# Altium PCB PCB1.PcbDoc
Units mm, origin at the board's own origin, x right, y up, seen from the top; angles counter-clockwise.
Board outline 109.75 x 55 mm, 2 copper layers (Top Layer, Bottom Layer); 17 components, 18 nets, 83 pads, 0 vias.
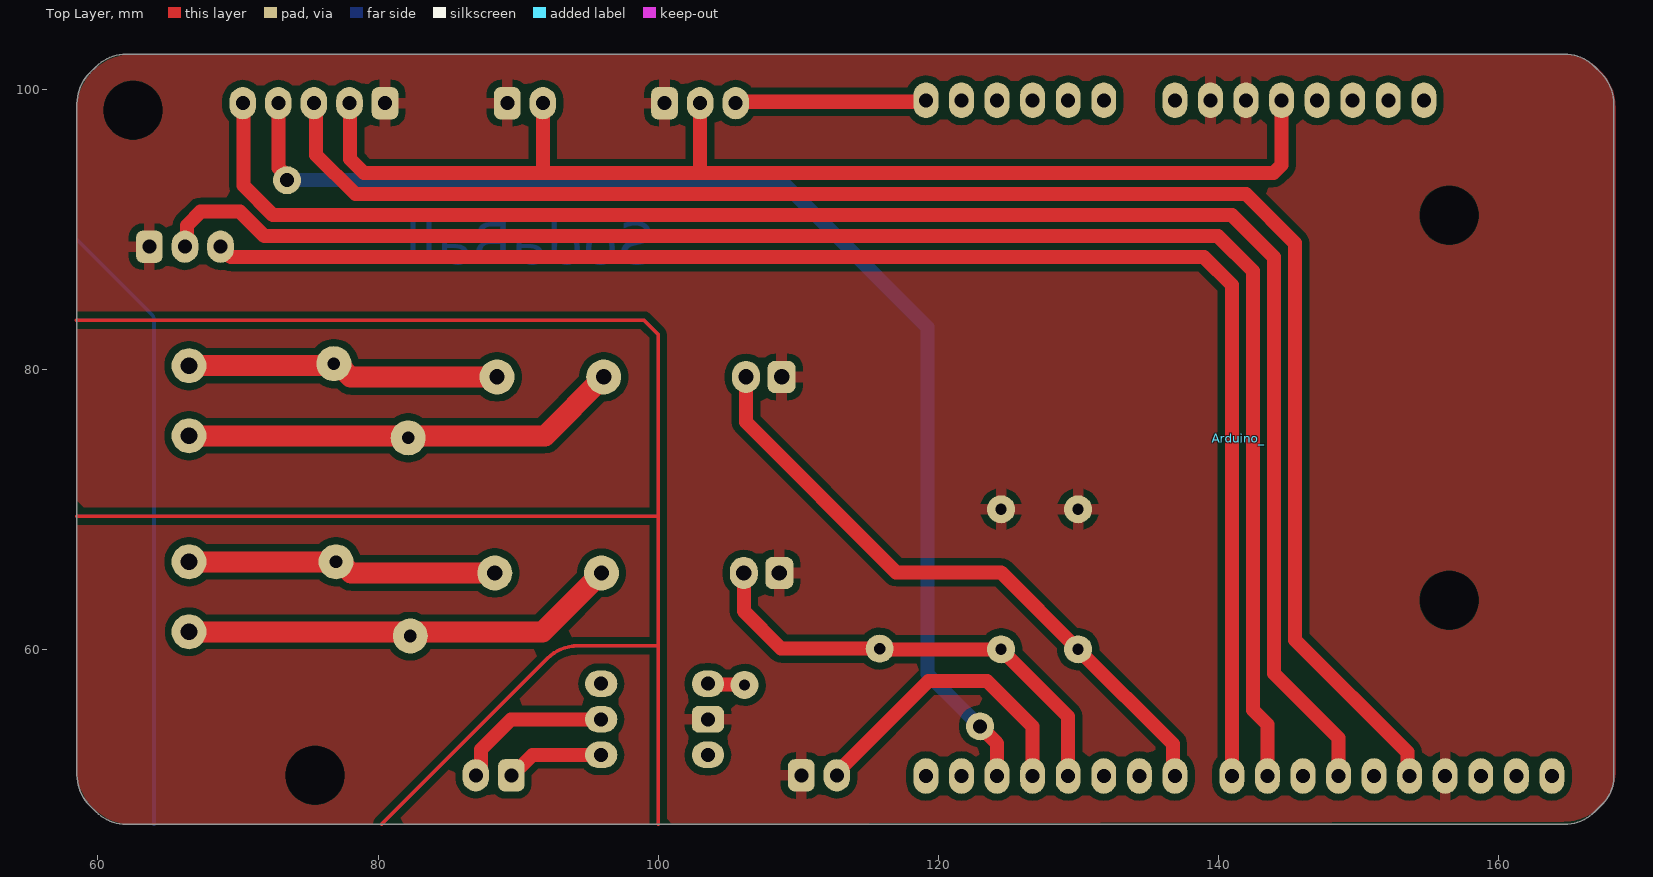
[diagram p0: Top Layer view]
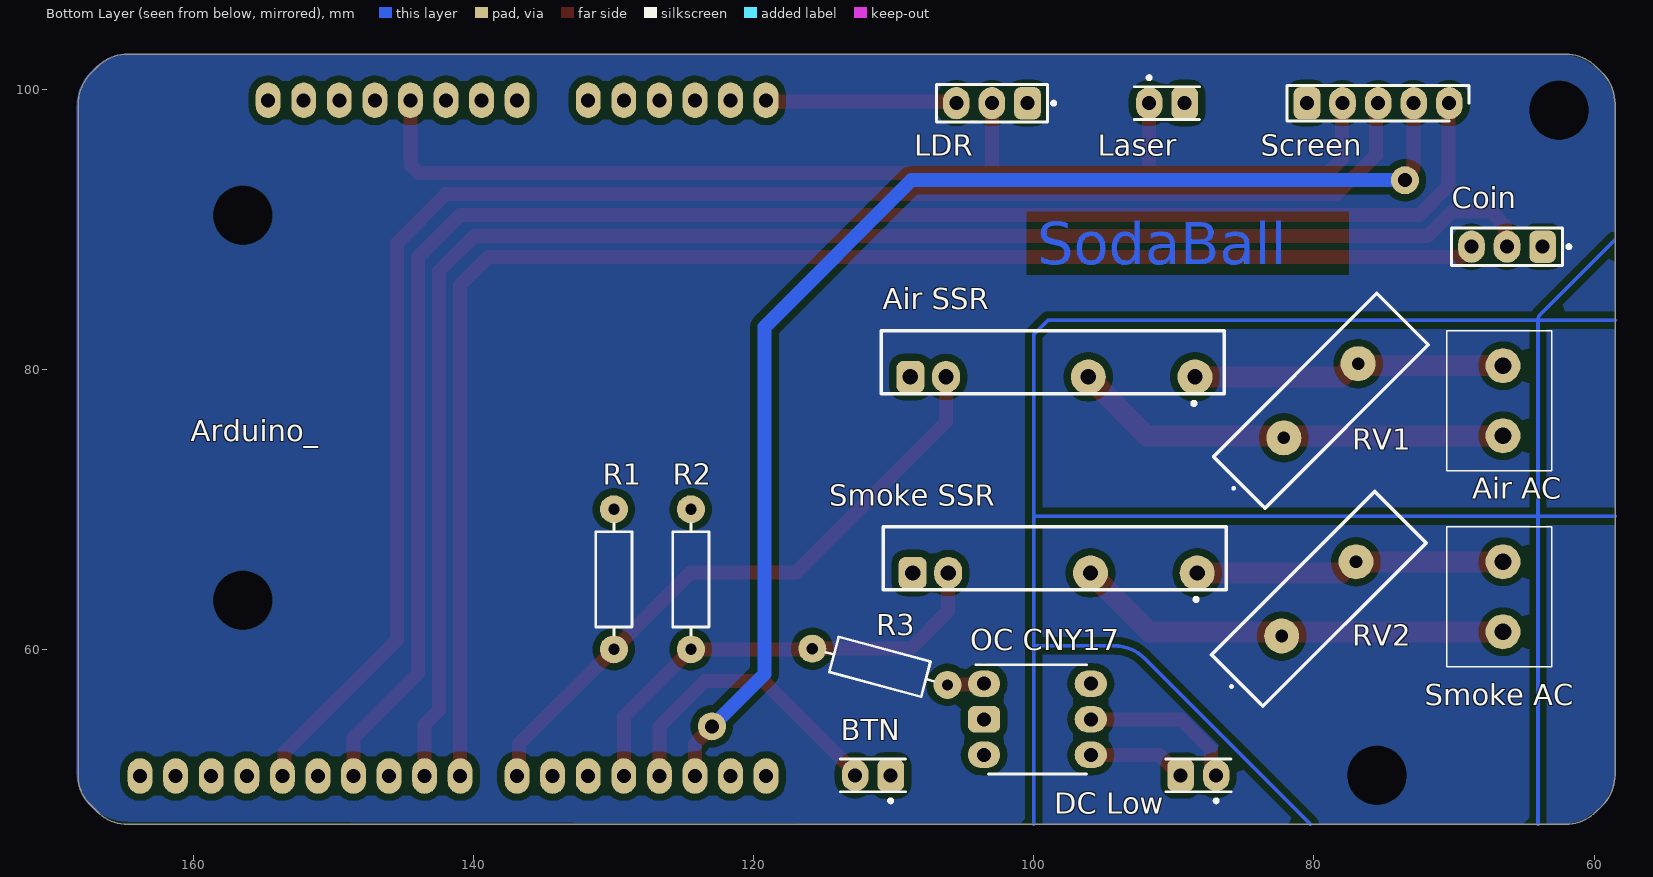
[diagram p1: Bottom Layer view, seen from below]
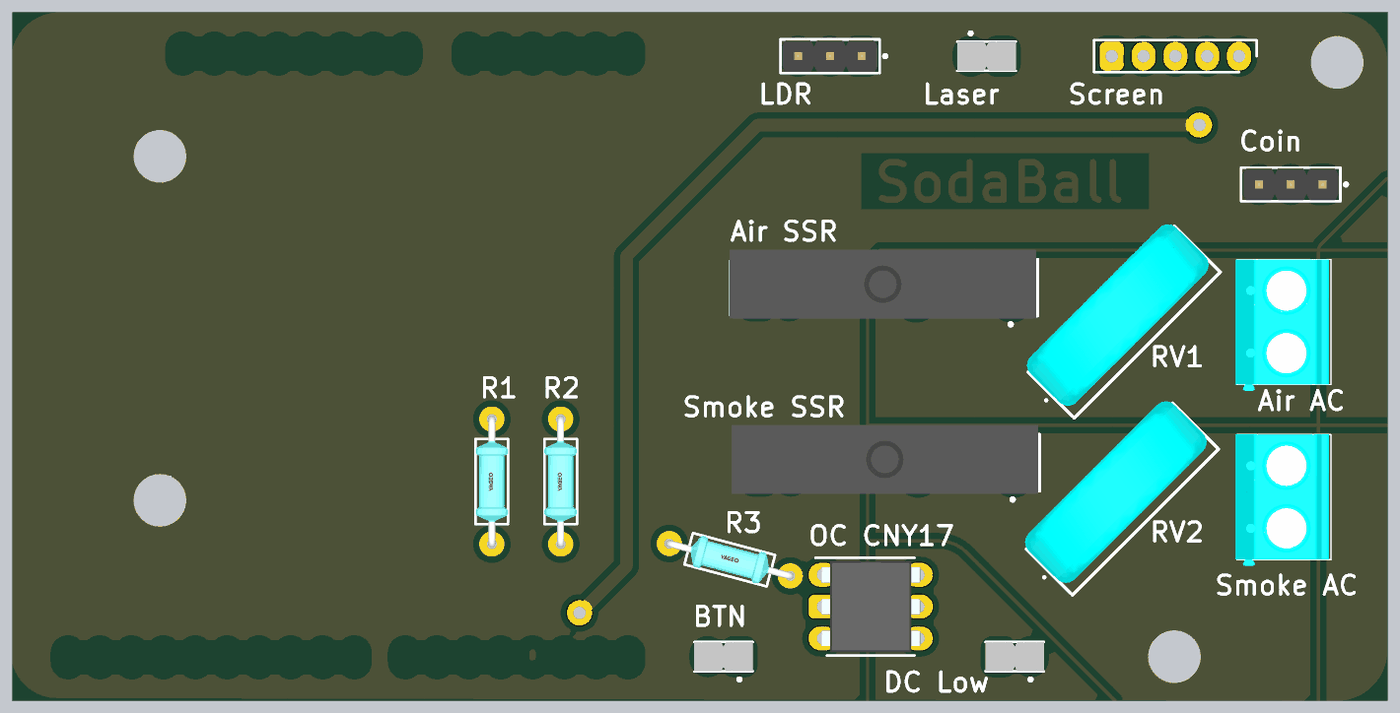
[diagram p2: 3D render of the assembled board from below, using the file's embedded part models]

## Layer stack, top to bottom
Top Solder: solder mask 0.0102, Solder Resist, Dk 3.5
Top Layer: signal copper 0.0356
Dielectric 1: dielectric 0.32, FR-4, Dk 4.8
Bottom Layer: signal copper 0.0356
Bottom Solder: solder mask 0.0102, Solder Resist, Dk 3.5

## Board outline
59.398,48.852 59.852,48.398 ccw(c62.02,50.566) 62.02,47.5 164.73,47.5 ccw(c164.73,50.566) 166.898,48.398 167.5,49 ccw(c165.689,50.811) 168.25,50.811 168.25,98.98 ccw(c165.184,98.98) 167.352,101.148 166.898,101.602 ccw(c164.73,99.434) 164.73,102.5 62.02,102.5 ccw(c62.02,99.434) 59.852,101.602 59.398,101.148 ccw(c61.566,98.98) 58.5,98.98 58.5,51.02 ccw(c61.566,51.02)

## Design rules (kind name [scope] priority, off if disabled: settings)
Clearance [All] p1: gap=0.5 ignorepadtopadclearanceinfootprint=FALSE except(0: Arc-Hole Track-Hole SMDPad-Hole THPad-Hole Via-Hole Fill-Hole Poly-Hole Region-Hole Text-Hole; 0.254: Arc-Text Track-Text SMDPad-Text THPad-Text Via-Text Fill-Text Poly-Text Region-Text Text-Text)
ComponentClearance [All] p1 off: gap=0.254 collisioncheckmode=3 verticalgap=0.254 showdistances=FALSE
Height [All] p1 off: minheight=0 maxheight=25.4 prefheight=12.7
HoleSize [All] p1: absolutevalues=TRUE maxlimit=3 minlimit=0.7 maxpercent=80.000 minpercent=20.000
MinimumSolderMaskSliver [All] p1: minsoldermaskwidth=0.125
PlaneConnect [All] p1: planeconnectstyle=Relief reliefexpansion=0.508 reliefentries=4 reliefconductorwidth=0.305 reliefairgap=0.254
PolygonConnect [All] p1: connectstyle=Relief reliefconductorwidth=0.8 reliefentries=4 polygonreliefangle="90 Angle" airgapwidth=0.5
RoutingVias [All] p1: holewidth=0.7 width=1.7 viastyle="Through Hole" minholewidth=0.7 minwidth=1.7 maxholewidth=0.7 maxwidth=1.7
SilkToSilkClearance [All] p1: silktosilkclearance=0.12
SilkToSolderMaskClearance [IsPad] p1: minsilkscreentomaskgap=0.1 clearancetoexposedcopper=TRUE
SolderMaskExpansion [All] p1: expansion=0.102 istentingtop=FALSE
SupplyNets "Schematic Supply Nets_2" [InNet('GND')] p1: voltage=0.000
Width [All] p1: maxlimit=3.048 minlimit=0.5 preferedwidth=1 minimp=50.000000 maximp=50.000000 favimp=50.000000
23 further rules are at their usual default settings.

## Components (designator, comment, footprint, x,y, rotation, side; value= is the part's Value field where it differs from the comment)
"Air AC" "KF301-2P" KF3012P 66.5,75.25 r90 bottom
"Air SSR" "G3MB-202P_DC5" G3MC-201PL 98.66,78.25 r180 bottom
Arduino_ "arduino shield_uno_rev3_with_holes" "ARDUINO UNO SHIELD WITH 3D MODEL" 182.632,101.749 r180 top locked
BTN "5-146280-2" TECO-5-146280-2_V#1 111.5,51 r0 bottom
Coin "61300311121" 61300311121 66.21,88.75 r0 bottom
"DC Low" "5-146280-2" TECO-5-146280-2_V#2 88.25,51 r0 bottom
Laser "5-146280-2" TECO-5-146280-2_V#2 90.5,99 r180 bottom
LDR "61300311121" 61300311121 103,99 r0 bottom
"OC CNY17" "CNY17-3" DIP762W60P254L730H430Q6N 99.75,55 r180 bottom
R1 "MF0207FTE52-10K" FP-MF0207-MFG 130,65 r90 bottom
R2 "MF0207FTE52-10K" FP-MF0207-MFG 124.5,65 r90 bottom
R3 "330R" FP-MF0207-MFG 111,58.75 r195 bottom
RV1 "MOV-14D431K" MOV-14D(5.2MM-T) 79.5,77.75 r135 bottom
RV2 "MOV-14D431K" MOV-14D(5.2MM-T) 79.652,63.598 r135 bottom
Screen "61300511121" HDRV5W64P0X254_1X5_1270X254X854P 70.34,99 r0 bottom
"Smoke AC" "KF301-2P" KF3012P 66.5,61.25 r90 bottom
"Smoke SSR" "G3MB-202P_DC5" G3MC-201PL 98.5,64.25 r180 bottom

## Footprints (in the part's own frame and the unit in brackets; to place one, negate y for a bottom-side part, rotate by r counter-clockwise, add the part's x,y. Pads: shape width x height; smd on the part's side, far side on the other; paste and mask are expansions set on the pad)
61300311121 [mm] "Pin Header, pitch 2.54 mm, THT, Vertical, single row, 3p"
  rrect50% 1.9x2.3 hole 1: 1(-2.54,0)
  oval 1.9x2.3 hole 1: 2(0,0) 3(2.54,0)
  silkscreen extent -4.53,-1.35 3.96,1.35, body extent -3.81,-1.27 3.81,1.27, height 8.57
"ARDUINO UNO SHIELD WITH 3D MODEL" [mil]
  oval 70x100 hole 39.37: 1(1300,100) 2(1400,100) 3(1500,100) 4(1600,100) 5(1700,100) 6(1800,100) 7(2000,100) 8(2100,100) 9(2200,100) 10(2300,100) 11(2400,100) 12(2500,100) 13(2500,2000) 14(2400,2000) 15(2300,2000) 16(2200,2000) 17(2100,2000) 18(2000,2000) 19(1900,2000) 20(1800,2000) 21(1640,2000) 22(1540,2000) 23(1440,2000) 24(1340,2000) 25(1240,2000) 26(1140,2000) 27(1040,2000) 28(940,2000) 29(840,2000) 30(740,2000) 31(1200,100) 32(1100,100)
  body extent -250,0 2700,2100, height 57
DIP762W60P254L730H430Q6N [mm]
  oval 2.3x1.9 hole 1: 1(-3.81,2.54) 3(-3.81,-2.54) 4(3.81,-2.54) 5(3.81,0) 6(3.81,2.54)
  rrect50% 2.3x1.9 hole 1: 2(-3.81,0)
  silkscreen extent -4.41,-3.9 3.5,3.9, body extent -3.96,-3.65 3.96,3.65, height 4.3
FP-MF0207-MFG [mm]
  round 2 hole 0.8 paste-2539.97 mask+0: 1(-5,0) 2(5,0)
  silkscreen extent -3.98,-1.3 3.98,1.3, body extent -5.28,-1.29 5.28,1.29, height 2.6
G3MC-201PL [mm]
  round 2.5 hole 1.1: 1(10.16,1.2) 2(2.54,1.2)
  oval 2x2.3 hole 1.1: 3(-7.62,1.2)
  rrect50% 2x2.3 hole 1.1: 4(-10.16,1.2)
  silkscreen extent -12.25,-0.82 12.25,4.5, body extent -12.37,-0.23 12.13,5.27, height 24.43
HDRV5W64P0X254_1X5_1270X254X854P [mm]
  oval 1.9x2.3 hole 1: 1(0,0) 2(2.54,0) 3(5.08,0) 4(7.62,0)
  rrect50% 1.9x2.3 hole 1: 5(10.16,0)
  silkscreen extent -1.42,-1.27 11.58,1.27
KF3012P [mm]
  round 2.5 hole 1.2: 1(0,0) 2(5,0)
  silkscreen extent -2.5,-3.5 7.5,4, body extent -2.99,-3.35 7.51,4.15, height 10
MOV-14D(5.2MM-T) [mm]
  round 2.5 hole 0.9: 1(-3.75,0) 2(3.75,0)
  silkscreen extent -8.87,-2.6 8.25,2.6, body extent -8.22,-1.84 8.28,3.36, height 20.83
TECO-5-146280-2_V#1 [mm] "Connector, 2-Leads, Body 4.67x2.34mm, Pitch 2.54mm"
  rrect50% 1.9x2.3 hole 1: 1(-1.27,0)
  oval 1.9x2.3 hole 1: 2(1.27,0)
  silkscreen extent -2.33,-1.17 2.33,1.94, body extent -2.34,-1.17 2.34,1.17, height 5.33
TECO-5-146280-2_V#2 [mm] "Connector, 2-Leads, Body 4.67x2.34mm, Pitch 2.54mm"
  oval 1.9x2.3 hole 1: 1(-1.27,0)
  rrect50% 1.9x2.3 hole 1: 2(1.27,0)
  silkscreen extent -2.33,-1.17 2.33,1.94, body extent -2.34,-1.17 2.34,1.17, height 5.33

## Part data
"Air AC" "Smoke AC": "Connector", Manufacturer_Name="Handson Technology", Datasheet Link=http://www.handsontec.com/dataspecs/terminal%20block-5mm.pdf, Height=10mm, Manufacturer_Part_Number=KF301-2P
"Air SSR" "Smoke SSR": "Relay or Contactor", Manufacturer_Name="OMRON Electronics", Manufacturer_Part_Number="G3MB-202P DC5", Mouser Part Number=653-G3MB-202P-DC5, Datasheet Link=http://www.mouser.com/ds/2/307/g3mb_0609-298620.pdf, Mouser Price/Stock=https://www.mouser.co.uk/ProductDetail/Omron-Automation-and-Safety/G3MB-202P-DC5?qs=lK7M36XCk6I5q71jdbaHVQ%3D%3D
BTN "DC Low" Laser: library part CMP-2000-07492-1, "Male Header, Pitch 2.54 mm, 1 x 2 Position, Height 8.21 mm, Tail Length 3.05 mm, -65 to 105 degC, RoHS, Bulk", Case\/Package=100, Colour=Black, Current Rating=3A, Flammability Rating=UL94V-0, High Temperature Housing=Yes, Manufacturer="TE Connectivity", Max Current Rating=5A, Max Operating Temperature=105degC, Min Operating Temperature=-65degC, Package Description="Male Header, Pitch 2.54 mm, 1 x 2 Position, Height 8.21 mm, Tail Length 3.05 mm", Package Quantity=500, Approvals=CSA, Board Standoff=No(Without), Connector Type=Header, Contact Gender=Male, Contact Material=CopperAlloy, Contact Mating Length=0.23inch, Contact Plating=Matte, Contact Protection=No(Without), Contact Shape=Square, Datasheet URL=http://www.te.com/commerce/DocumentDelivery/DDEController?Action=showdoc&DocId=Customer+Drawing%7F146280%7FH1%7Fpdf%7FEnglish%7FENG_CD_146280_H1.pdf%7F5-146280-2, Datasheet Version="Rev. H1, 08/2016", Depth=2.34mm, Gasket=No(Without), High Speed Serial Data Connector=No, Housing Colour=Black, Housing Material=Polymer, Keyed=No, Length=4.67mm, Manufacturer URL=http://www.te.com/, Mating Alignment=No(Without), Mating Connector Lock=No(Without), Mating Post Length=0.23inch, Mount=ThroughHole, Mounting Technology=ThroughHole, Number of Contacts=2, Number of Positions=2, Number of Rows=1, Orientation=Straight, Package Reference=5-146280-2, Packaging=Carton, Panel Mount Retention=No(Without), PCB Mount Retention=Without, PCB Mounting Orientation=Vertical, PCB Thickness=0.063inch, Pitch=2.54mm, Radiation Hardening=No, RoHSCompliant=true, Row Spacing=2.54mm, Selectively Loaded=No(Without), Stabilizers=No(Without), Termination=ThroughHole, Termination Post Length=0.12inch
Coin LDR: library part CMP-1502-01062-3, Color=Black, Contact Resistance=20mΩ, Current Rating=3A, Max Operating Temperature=105°C, Min Operating Temperature=-40°C, Operating Supply Voltage=250V, Connector Type="Male Pin", Contact Material=Copper, Contact Mating Length=5.9944mm, Contact Plating=Gold, Gender=Male, Height=8.94mm, Lead Free="Lead Free", Lead Pitch=2.54mm, Mount="Through Hole", NexarPartId=32855521, Number of Contacts=3, Number of Pins=3, Number of Positions=3, Number of Rows=1, Orientation=Vertical, Packaging=Bulk, Pitch=2.54mm, REACH SVHC=Unknown, RoHS=Compliant, Termination=Solder, Voltage Rating=250V
"OC CNY17": "Transistor", Manufacturer_Name=Vishay, Mouser Part Number=782-CNY17-3, Arrow Part Number=CNY17-3, Arrow Price/Stock=https://www.arrow.com/en/products/cny17-3/vishay?region=europe, Datasheet Link=https://www.vishay.com/docs/83606/cny17.pdf, Height=4.3mm, Manufacturer_Part_Number=CNY17-3, Mouser Price/Stock=https://www.mouser.co.uk/ProductDetail/Vishay-Semiconductors/CNY17-3?qs=BAbuF51x%252B%252BZgvdu84VHn%252Bw%3D%3D
R1 R2: library part CMP-03413-000006-1, "RES 10K OHM 1% 0.6W AXIAL", Case/Package=Conformal, Max Operating Temperature=155°C, Min Operating Temperature=-55°C, Resistance=10kR, Resistor Type="Metal Film", Temperature Coefficient=50ppm/°C, Tolerance=1%, Construction=Cylindrical, Contact Plating=Tin, Diameter=2.4mm, Lead Free="Lead Free", Length=6.3mm, Military Standard=Not, Mount="Through Hole", Packaging="Ammo Pack", Radiation Hardening=No, RoHS Compliant=Yes, Termination=Axial
R3: library part CMP-03413-000006-1, "RES 330 OHM AXIAL", Case/Package=Conformal, Max Operating Temperature=155°C, Min Operating Temperature=-55°C, Resistance=10kR, Resistor Type="Metal Film", Temperature Coefficient=50ppm/°C, Tolerance=1%, Construction=Cylindrical, Contact Plating=Tin, Diameter=2.4mm, Lead Free="Lead Free", Length=6.3mm, Military Standard=Not, Mount="Through Hole", Packaging="Ammo Pack", Radiation Hardening=No, RoHS Compliant=Yes, Termination=Axial
RV1 RV2: "Varistor", Manufacturer_Name=Bourns, Mouser Part Number=652-MOV-14D431K, Arrow Part Number=MOV-14D431K, Arrow Price/Stock=https://www.arrow.com/en/products/mov-14d431k/bourns?utm_currency=USD&region=nac, Datasheet Link=https://componentsearchengine.com/Datasheets/1/MOV-14D431K.pdf, Manufacturer_Part_Number=MOV-14D431K, Mouser Price/Stock=https://www.mouser.co.uk/ProductDetail/Bourns/MOV-14D431K?qs=CQ3B1E%252BbPs0oqNHNiUHWVg%3D%3D
Screen: "Connector", Manufacturer_Name="Wurth Elektronik", Mouser Part Number=710-61300511121, Datasheet Link=https://www.we-online.com/catalog/datasheet/61300511121.pdf, Height=8.54mm, Manufacturer_Part_Number=61300511121, Mouser Price/Stock=https://www.mouser.co.uk/ProductDetail/Wurth-Elektronik/61300511121?qs=PhR8RmCirEZCsCRHq%252BvfRQ%3D%3D

## Free pads (board coordinates)
  round 2 hole 1: 7(73.5,93.5) 14(123,54.5)
  round 1 hole 4.2: 8(62.5,98.5)
  round 1.524 hole 4.2: 11(75.5,51) 12(156.5,91) 13(156.5,63.5)

## Nets (pads, with @x,y where several pads share a name; then routed paths per layer and width w, separated by ;. In a path a pad name is that pad's centre, name@x,y a point inside that pad or via, vN(x,y) a via of type N, cw(c..) or ccw(c..) an arc to the next point about the centre after c; other vN are vias at no path point)
GND: "Air SSR.4" "OC CNY17.2" "Smoke SSR.4" Arduino_.4 Arduino_.5 Arduino_.27 BTN.1 Coin.1 Laser.2 LDR.1 R1.2 R2.2 Screen.5
"NetAir AC_1": "Air AC.1" "Air SSR.2" RV1.1 | length 31.4
  Top Layer w1.5: 66.5,75.25 82.152,75.25 91.92,75.25 96.12,79.45
"NetAir SSR_3": "Air SSR.3" Arduino_.20 R1.1 | length 45.6
  Top Layer w1: 106.28,79.45 106.28,76.22 117,65.5 124.5,65.5 R1.1 136.763,53.237 136.763,51.098 Arduino_.20
NetArduino__3: Arduino_.3 Laser.1 LDR.2 Screen.4 | length 85.9
  Top Layer w1: Screen.4 78,98.96 78,95 79,94 91.7,94 ; Laser.1 91.77,94.07 91.7,94 ; LDR.2 103,94 ; Arduino_.3 144.532,94.586 143.946,94 103,94 ; 91.7,94 103,94
NetArduino__12: Arduino_.12 LDR.3 | length 13.7
  Top Layer w1: LDR.3 105.644,99.104 119.027,99.104 Arduino_.12
NetArduino__15: Arduino_.15 pad.7 pad.14 Screen.2 | length 90
  Top Layer w1: Screen.2 72.88,94.391 73.5,93.771 pad.7 ; pad.14 124.212,53.288 Arduino_.15
  Bottom Layer w1: pad.7 108.75,93.5 119.25,83 119.25,58.25 pad.14
NetArduino__16: Arduino_.16 BTN.2 | length 22.2
  Top Layer w1: BTN.2 112.77,51.2 119.32,57.75 123.5,57.75 126.752,54.498 Arduino_.16
  Bottom Layer w0.508: Arduino_.16 Arduino_.16@126.752,51.33
NetArduino__17: "Smoke SSR.3" Arduino_.17 R2.1 R3.1 | length 32.5
  Top Layer w1: 106.12,64.7 106.12,62.718 108.794,60.044 R3.1 ; R3.1@115.83,60 R2.1 129.292,55.208 Arduino_.17
NetArduino__21: Arduino_.21 Coin.3 | length 108.4
  Top Layer w1: Coin.3 69.5,88 139,88 140.976,86.024 Arduino_.21
NetArduino__22: Arduino_.22 Coin.2 | length 116.4
  Top Layer w1: Coin.2 66.349,88.889 66.349,90.276 67.324,91.25 70.129,91.25 71.879,89.5 140,89.5 142.492,87.008 142.492,55.658 143.516,54.634 Arduino_.22
NetArduino__24: Arduino_.24 Screen.1 | length 120.6
  Top Layer w1: Screen.1 70.38,98.96 70.38,93.12 72.5,91 141,91 144.001,87.999 144.001,58.274 148.596,53.679 Arduino_.24
NetArduino__26: Arduino_.26 Screen.3 | length 117.7
  Top Layer w1: Screen.3 75.584,98.836 75.584,95.294 78.379,92.5 142,92.5 145.501,88.999 145.501,60.674 153.527,52.648 153.527,51.098 Arduino_.26
"NetDC Low_1": "DC Low.1" "OC CNY17.5" | length 11.5
  Top Layer w1: 86.98,51 87.351,51.371 87.351,52.851 89.5,55 95.94,55
"NetDC Low_2": "DC Low.2" "OC CNY17.4" | length 7
  Top Layer w1: 89.52,51 89.564,51 91.024,52.46 95.94,52.46
NetLabel2_1: "Air AC.2" "Air SSR.1" RV1.2 | length 22.3
  Top Layer w1.5: 66.5,80.25 77.244,80.25 78.044,79.45 88.5,79.45
"NetOC CNY17_1": "OC CNY17.1" R3.2 | length 2.6
  Top Layer w1: 103.56,57.54 103.602,57.498 106.128,57.498 R3.2
NetRV2_1: "Smoke AC.1" "Smoke SSR.2" RV2.1 | length 31.2
  Top Layer w1.5: 66.5,61.25 82.303,61.25 91.76,61.25 95.96,65.45
NetRV2_2: "Smoke AC.2" "Smoke SSR.1" RV2.2 | length 22.2
  Top Layer w1.5: 66.5,66.25 RV2.2 77.271,66.25 78.071,65.45 88.34,65.45
pads on no net: "OC CNY17.3" "OC CNY17.6" Arduino_.1 Arduino_.2 Arduino_.6 Arduino_.7 Arduino_.8 Arduino_.9 Arduino_.10 Arduino_.11 Arduino_.13 Arduino_.14 Arduino_.18 Arduino_.19 Arduino_.23 Arduino_.25 Arduino_.28 Arduino_.29 Arduino_.30 Arduino_.31 Arduino_.32
copper on no net: | length 330.6
  Top Layer w0.254: 58.444,83.5 99,83.5 100,82.5 100,47.5 ; 58.5,69.5 100,69.5 ; 80.25,47.5 92.102,59.352 cw(c94.27,57.184) 94.27,60.25 100,60.25
  Bottom Layer w0.254: 58.5,69.5 100,69.5 ; 58.5,83.5 99,83.5 100,82.5 100,47.5 ; 58.555,89.195 63.823,83.927 cw(c63.396,83.5) 64,83.5 64,47.5 ; 80.25,47.5 92.102,59.352 cw(c94.27,57.184) 94.27,60.25 100,60.25

## Polygon pours and split planes (outlines as drawn)
GND on Top Layer "GND_L01_P001" (solid, pour order 1): 115.003,47.585 62.532,47.473 cw(c62.523,51.496) 58.5,51.496 58.5,98.5 cw(c62.5,98.5) 62.5,102.5 164.5,102.5 cw(c164.5,98.6) 168.4,98.6 168.4,51.404 cw(c164.688,51.404) 164.696,47.692
no net on Bottom Layer "NONET_L02_P000" (solid, pour order 0): 58.5,51.496 58.5,98.5 cw(c62.5,98.5) 62.5,102.5 164.5,102.5 cw(c164.5,98.6) 168.4,98.6 168.4,51.404 cw(c164.687,51.404) 164.695,47.691 62.531,47.473 cw(c62.522,51.496)

## Other copper
Bottom Layer:
  text "SodaBall" at 99.75,87.5 h3

## Silkscreen, mask and mechanical layers (free items; w line width, h text height)
Mechanical 1:
  lines w0.254: 110.75,102.5 164.73,102.5 cw(c164.73,99.434) 166.898,101.602 167.602,100.898 cw(c165.434,98.73) 168.5,98.73 168.5,51.27 cw(c165.434,51.27) 167.602,49.102 167.148,48.648
Mechanical 2:
  lines w0.254: 58.5,51.02 ccw(c61.566,51.02) 59.398,48.852 59.852,48.398 ccw(c62.02,50.566) 62.02,47.5 164.73,47.5 ccw(c164.73,50.566) 166.898,48.398 167.5,49 ccw(c165.689,50.811) 168.25,50.811 168.25,98.98 ccw(c165.184,98.98) 167.352,101.148 166.898,101.602 ccw(c164.73,99.434) 164.73,102.5 62.25,102.5 62.02,102.5 ccw(c62.02,99.434) 59.852,101.602 59.398,101.148 ccw(c61.566,98.98) 58.5,98.98 58.5,51.02